# Altium PCB PCB.PcbDoc
Units mm, origin at the board's own origin, x right, y up, seen from the top; angles counter-clockwise.
Board outline 61 x 51 mm, 2 copper layers (Top Layer, Bottom Layer); 21 components, 15 nets, 103 pads, 9 vias.
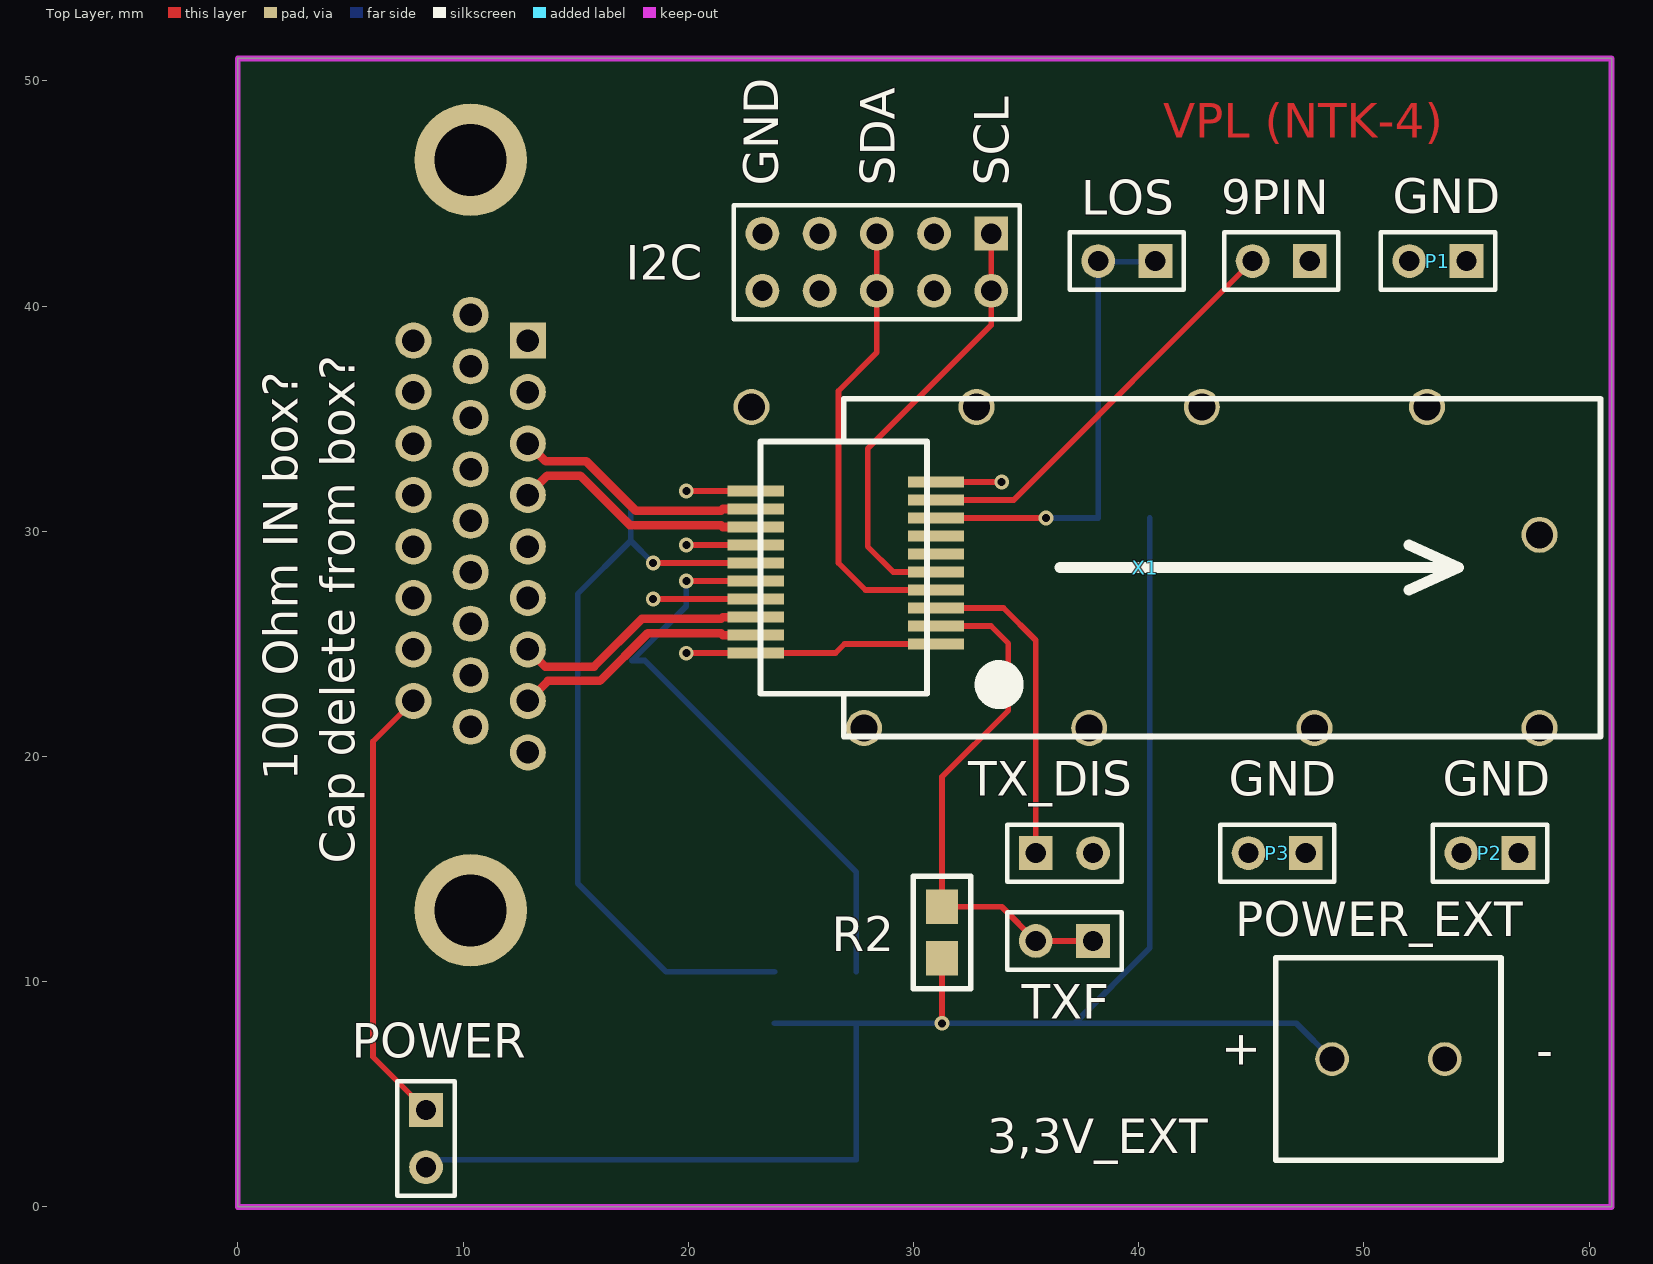
[diagram p0: Top Layer view]
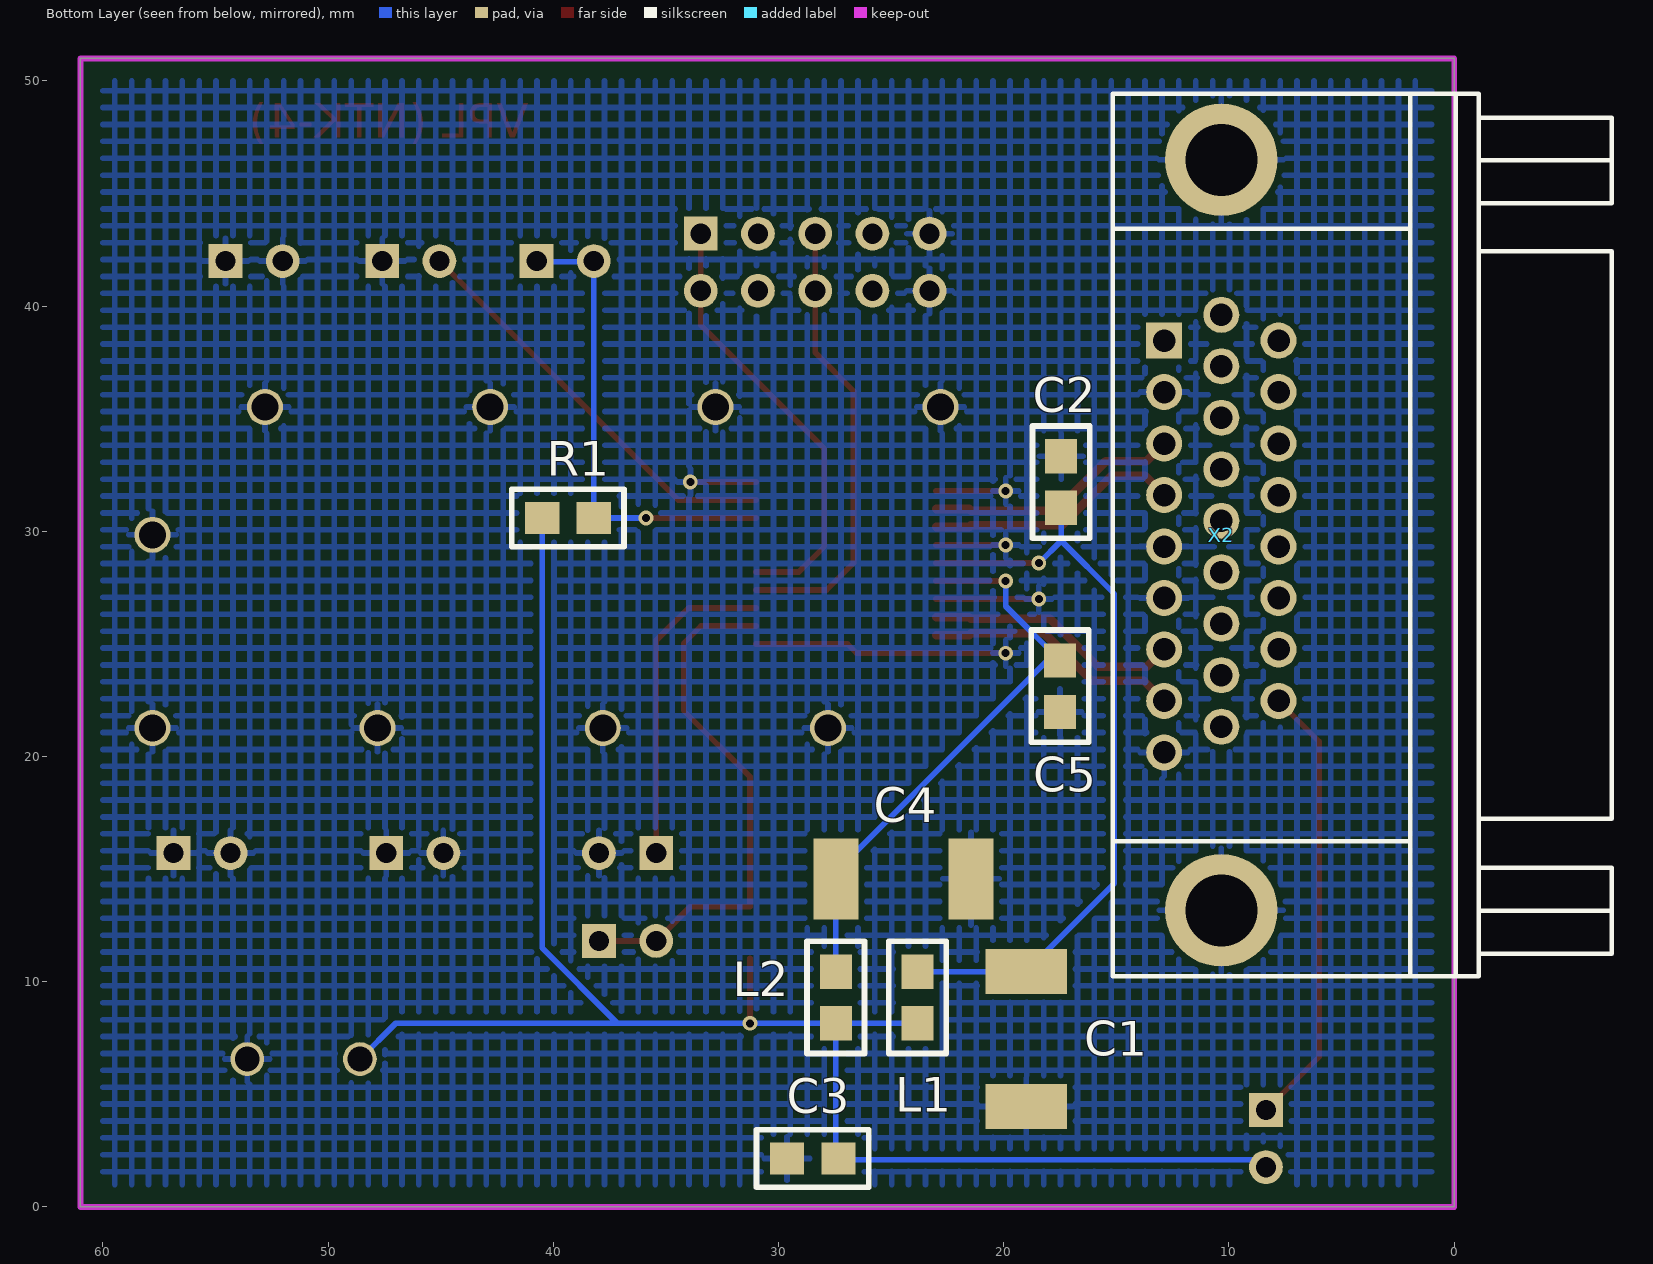
[diagram p1: Bottom Layer view, seen from below]

## Layer stack, top to bottom
Top Solder: solder mask 0.0102, Solder Resist, Dk 3.5
Top Layer: signal copper 0.0356
Dielectric 1: dielectric 0.32, FR-4, Dk 4.8
Bottom Layer: signal copper 0.0356
Bottom Solder: solder mask 0.0102, Solder Resist, Dk 3.5

## Board outline
0,0 0,51 61,51 61,0

## Design rules (kind name [scope] priority, off if disabled: settings)
Clearance [All] p1: gap=0.254
DiffPairsRouting [All] p1: maxlimit=0.254 minlimit=0.254 mostfreqgap=0.254 toplayer_minwidth=0.381 toplayer_maxwidth=0.381 toplayer_prefwidth=0.381 bottomlayer_minwidth=0.381 bottomlayer_maxwidth=0.381 bottomlayer_prefwidth=0.381 maxuncoupledlength=12.7
PolygonConnect [All] p1: connectstyle=Relief reliefconductorwidth=0.254 reliefentries=4 polygonreliefangle="90 Angle" airgapwidth=0.254
RoutingVias [All] p1: holewidth=0.711 width=1.27 viastyle="Through Hole" minholewidth=0.711 minwidth=1.27 maxholewidth=0.711 maxwidth=1.27
SolderMaskExpansion [All] p1: expansion=0.102
Width [All] p1: maxlimit=0.254 minlimit=0.254 preferedwidth=0.254
28 further rules are at their usual default settings.

## Classes and differential pairs
differential pair TD: +TD_P -TD_N
differential pair RD: +RD_P -RD_N

## Components (designator, comment, footprint, x,y, rotation, side; value= is the part's Value field where it differs from the comment)
9PIN "Header 2" HDR1X2 47.6,42 r180 top
C1 "22,0" Cap_BIG 20.904,3.367 r180 bottom
C2 "0,1" CAP_SMALL 16.18,29.681 r90 bottom
C3 "0,1" CAP_SMALL 30.988,0.878 r180 bottom
C4 "22,0" Cap_BIG 28.55,16.473 r270 bottom
C5 "0,1" CAP_SMALL 16.231,20.614 r90 bottom
I2C "Header 5X2" HDR2X5 33.452,43.22 r180 top
L1 "4.7uH" RES 25.07,6.821 r180 bottom
L2 "4.7uH" RES 28.702,6.821 r180 bottom
LOS "Header 2" HDR1X2 40.742,42 r180 top
P1 "GND" HDR1X2 54.559,42 r180 top
P2 "GND" HDR1X2 56.871,15.711 r180 top
P3 "GND" HDR1X2 47.422,15.711 r180 top
POWER "Header 2" HDR1X2 8.357,4.307 r270 top
POWER_EXT "KL_2" KLEMMNIK_2 48.59,6.567 r0 top (schematic designator X3)
R1 "4.7к" RES 41.834,31.84 r270 bottom
R2 "4.7к" RES 30.023,9.703 r0 top
TX_DIS "Header 2" HDR1X2 35.433,15.711 r0 top
TXF "Header 2" HDR1X2 37.973,11.811 r180 top (schematic designator TX_FAULT)
X1 "SFP" SFP-20pin 60.503,20.893 r90 top
X2 "DHR-26F" DHR-26F -1.092,29.834 r90 bottom

## Footprints (in the part's own frame and the unit in brackets; to place one, negate y for a bottom-side part, rotate by r counter-clockwise, add the part's x,y. Pads: shape width x height; smd on the part's side, far side on the other; paste and mask are expansions set on the pad)
Cap_BIG [mm] "FROM_MAX"
  rect 3.6x2 smd: 1(1.905,7.092) 2(1.905,1.092)
  body extent 0,-0.01 3.81,8.19, height 2.54
CAP_SMALL [mil] "FROM_MAX"
  rect 60x55.98 smd: 1(53.71,50) 2(143.71,50)
  silkscreen extent 1,0 197,100, body extent 20,18 178,82, height 100
DHR-26F [mm]
  rect 1.6x1.6 hole 1: 1(8.636,13.97)
  round 1.6 hole 1: 2(6.35,13.97) 3(4.064,13.97) 4(1.778,13.97) 5(-0.508,13.97) 6(-2.794,13.97) 7(-5.08,13.97) 8(-7.366,13.97) 9(-9.652,13.97) 10(9.779,11.43) 11(7.493,11.43) 12(5.207,11.43) 13(2.921,11.43) 14(0.635,11.43) 15(-1.651,11.43) 16(-3.937,11.43) 17(-6.223,11.43) 18(-8.509,11.43) 19(8.636,8.89) 20(6.35,8.89) 21(4.064,8.89) 22(1.778,8.89) 23(-0.508,8.89) 24(-2.794,8.89) 25(-5.08,8.89) 26(-7.366,8.89)
  round 5 hole 3.2: 27(-16.662,11.43) 28(16.662,11.43)
  silkscreen extent -19.6,-5.9 19.6,16.26, body extent -19.6,-6.16 19.54,15.24, height 12.47
HDR1X2 [mm] "Connector; Header; 2 Position"
  rect 1.5x1.5 hole 0.9: 1(0,0)
  round 1.5 hole 0.9: 2(2.54,0)
  silkscreen extent -1.27,-1.27 3.81,1.27
HDR2X5 [mm] "Connector; Header; 5x2 Position"
  rect 1.5x1.5 hole 0.9: 1(0,0)
  round 1.5 hole 0.9: 2(0,2.54) 3(2.54,0) 4(2.54,2.54) 5(5.08,0) 6(5.08,2.54) 7(7.62,0) 8(7.62,2.54) 9(10.16,0) 10(10.16,2.54)
  silkscreen extent -1.27,-1.27 11.43,3.81
KLEMMNIK_2 [mm]
  round 1.5 hole 1.1: 1(0,0) 2(5,0)
  silkscreen extent -2.5,-4.5 7.5,4.5
RES [mil] "FROM_MAX"
  rect 55.98x60 smd: 1(49,52.71) 2(49,142.71)
  silkscreen extent -1,0 99,196, body extent 17,19 81,177, height 100
SFP-20pin [mm] "SFP-20pin"
  rect 0.5x2.5 smd: 1(4.1,29.5) 2(4.9,29.5) 3(5.7,29.5) 4(6.5,29.5) 5(7.3,29.5) 6(8.1,29.5) 7(8.9,29.5) 8(9.7,29.5) 9(10.5,29.5) 10(11.3,29.5) 11(10.9,37.5) 12(10.1,37.5) 13(9.3,37.5) 14(8.5,37.5) 15(7.7,37.5) 16(6.9,37.5) 17(6.1,37.5) 18(5.3,37.5) 19(4.5,37.5) 20(3.7,37.5)
  round 1.6 hole 1.2: h(0.375,32.7) h(0.375,22.7) h(0.375,12.7) h(0.375,2.7) h(8.95,2.7) h(14.625,27.7) h(14.625,37.7) h(14.625,7.7) h(14.625,17.7)
  silkscreen extent 0,0 15,37.3, body extent 1.9,29.9 13.1,37.3, height 5.4

## Part data
9PIN LOS POWER TX_DIS TXF: "Header, 2-Pin"
C1 C4: library part CAP_BIG
C2 C3 C5: library part CAP_SMALL
I2C: "Header, 5-Pin, Dual row"
L1 L2 R1 R2: library part RES
P1 P2 P3: library part "Header 2", "Header, 2-Pin"
POWER_EXT: library part KLEMMNIK_2
X1: library part SFP-20pin

## Via types
v1: diameter 0.65, hole 0.35, Top Layer to Bottom Layer, 9 vias

## Nets (pads, with @x,y where several pads share a name; then routed paths per layer and width w, separated by ;. In a path a pad name is that pad's centre, name@x,y a point inside that pad or via, vN(x,y) a via of type N, cw(c..) or ccw(c..) an arc to the next point about the centre after c; other vN are vias at no path point)
3,3V: C3.2 L1.1 L2.1 POWER.2 POWER_EXT.1 R1.1 R2.1 | length 77.5
  Top Layer w0.254: v1(31.267,8.153) R2.1
  Bottom Layer w0.254: POWER.2 8.679,2.09 C3.2@27.457,2.09 ; L1.1 L2.1 ; R1.1 40.495,11.495 37.16,8.16 ; POWER_EXT.1 46.997,8.16 37.16,8.16 ; C3.2@27.457,2.09 C3.2@27.457,2.097 ; C3.2@27.457,2.09 27.465,2.097 C3.2@27.457,2.097 ; C3.2@27.457,2.097 L2.1 ; L2.1 37.16,8.16
3,3V_BOX: POWER.1 X2.26 | length 19.9
  Top Layer w0.254: X2.26 6,20.67 6,6.663 POWER.1
GND: 9PIN.1 C1.2 C2.2 C3.1 C4.1 C5.1 I2C.9 I2C.10 P1.1 P1.2 P2.1 P2.2 P3.1 P3.2 POWER_EXT.2 TX_DIS.2 X1.1 X1.10 X1.11 X1.14 X1.17 X1.20 X1.h X2.2 X2.5 X2.6 X2.9 X2.27 X2.28 | length 24.9
  Top Layer w0.254: v1(18.44,26.993) X1.17 ; v1(19.914,24.593) X1.20 26.535,24.593 26.935,24.993 X1.1 ; v1(19.914,29.393) X1.14 ; v1(19.914,31.793) X1.11 ; X1.10 v1(33.912,32.193)
Net9PIN_2: 9PIN.2 X1.9 | length 18.5
  Top Layer w0.254: X1.9 34.452,31.393 9PIN.2
NetLOS_1: LOS.1 LOS.2 R1.2 X1.8 | length 21.1
  Top Layer w0.254: X1.8 v1(35.887,30.593)
  Bottom Layer w0.254: v1(35.887,30.593) 35.89,30.596 R1.2 38.209,41.968 38.202,41.975 LOS.1@40.742,41.975
NetTX_DIS_1: TX_DIS.1 X1.3 | length 14.5
  Top Layer w0.254: X1.3 34,26.593 35.433,25.16 TX_DIS.1
RD_N: X1.12 X2.3 | length 11.4
  Top Layer w0.381: X2.3 13.665,33.11 15.469,33.11 17.668,30.911 21.457,30.911 21.539,30.993 X1.12
RD_P: X1.13 X2.4 | length 11.4
  Top Layer w0.381: X2.4 13.741,32.475 15.206,32.475 17.405,30.276 21.457,30.276 21.539,30.193 X1.13
SCL: I2C.1 I2C.2 X1.5 | length 19.7
  Top Layer w0.254: X1.5 29.098,28.193 27.965,29.326 27.965,33.669 33.452,39.156 I2C.2 I2C.1
SDA: I2C.5 I2C.6 X1.4 | length 20.2
  Top Layer w0.254: I2C.5 I2C.6 28.372,37.936 26.67,36.235 26.67,28.589 27.866,27.393 X1.4
TD_N: X1.19 X2.8 | length 11.4
  Top Layer w0.381: X2.8 13.767,23.357 16.078,23.357 18.197,25.476 21.457,25.476 21.539,25.393 X1.19
TD_P: X1.18 X2.7 | length 11.4
  Top Layer w0.381: X2.7 13.64,23.992 15.815,23.992 17.934,26.111 21.457,26.111 21.539,26.193 X1.18
"TX FAULT": R2.2 TXF.1 TXF.2 X1.2 | length 23.8
  Top Layer w0.254: X1.2 33.44,25.793 34.214,25.019 34.214,22.047 31.267,19.101 R2.2 33.916,13.328 TXF.2 TXF.1
VCCRX: C1.1 C2.1 L1.2 X1.15 | length 34
  Top Layer w0.254: v1(18.44,28.593) X1.15 X1.15@22.992,28.582
  Bottom Layer w0.254: C2.1 17.45,29.584 ; v1(18.44,28.593) 17.45,29.584 ; L1.2 19.012,10.446 C1.1 15.088,14.371 15.088,27.221 17.45,29.584
VCCTX: C4.2 C5.2 L2.2 X1.16 | length 25.9
  Top Layer w0.254: v1(19.914,27.793) X1.16
  Bottom Layer w0.254: v1(19.914,27.793) 19.914,26.677 C5.2 18.067,24.264 27.457,14.873 C4.2 L2.2
pads on no net: I2C.3 I2C.4 I2C.7 I2C.8 X1.6 X1.7 X2.1 X2.10 X2.11 X2.12 X2.13 X2.14 X2.15 X2.16 X2.17 X2.18 X2.19 X2.20 X2.21 X2.22 X2.23 X2.24 X2.25

## Polygon pours and split planes (outlines as drawn)
GND on Bottom Layer "Top Layer-No Net" (hatched 90Degree grid 0.75 track 0.254, remove dead copper, pour order 3): 1,50 60,50 60,1 1,1

## Keep-outs
Keep-Out Layer:
  the board outline again, w0.254

## Other copper
Top Layer:
  text "VPL (NTK-4)" at 41.097,47.473 h1.52

## Silkscreen, mask and mechanical layers (free items; w line width, h text height)
Top Overlay:
  text "GND" at 24.003,45.353 h1.52 r90
  text "SDA" at 29.159,45.353 h1.52 r90
  text "SCL" at 34.239,45.353 h1.52 r90
  text "100 Ohm IN box?" at 2.667,18.915 h1.52 r90
  text "Cap delete from box?" at 5.182,15.234 h1.52 r90
  text "-" at 58.42,7.366 h1.52 r180
  text "+" at 45.212,6.096 h1.52 r90
  text "3,3V_EXT" at 33.274,2.388 h1.52